# Altium PCB backup-FallDetection.PcbDoc
Units mil, origin at the board's own origin, x right, y up, seen from the top; angles counter-clockwise.
Board outline 2362.2 x 2362.2 mil, 2 copper layers (Top Layer, Bottom Layer); 36 components, 37 nets, 235 pads, 18 vias.
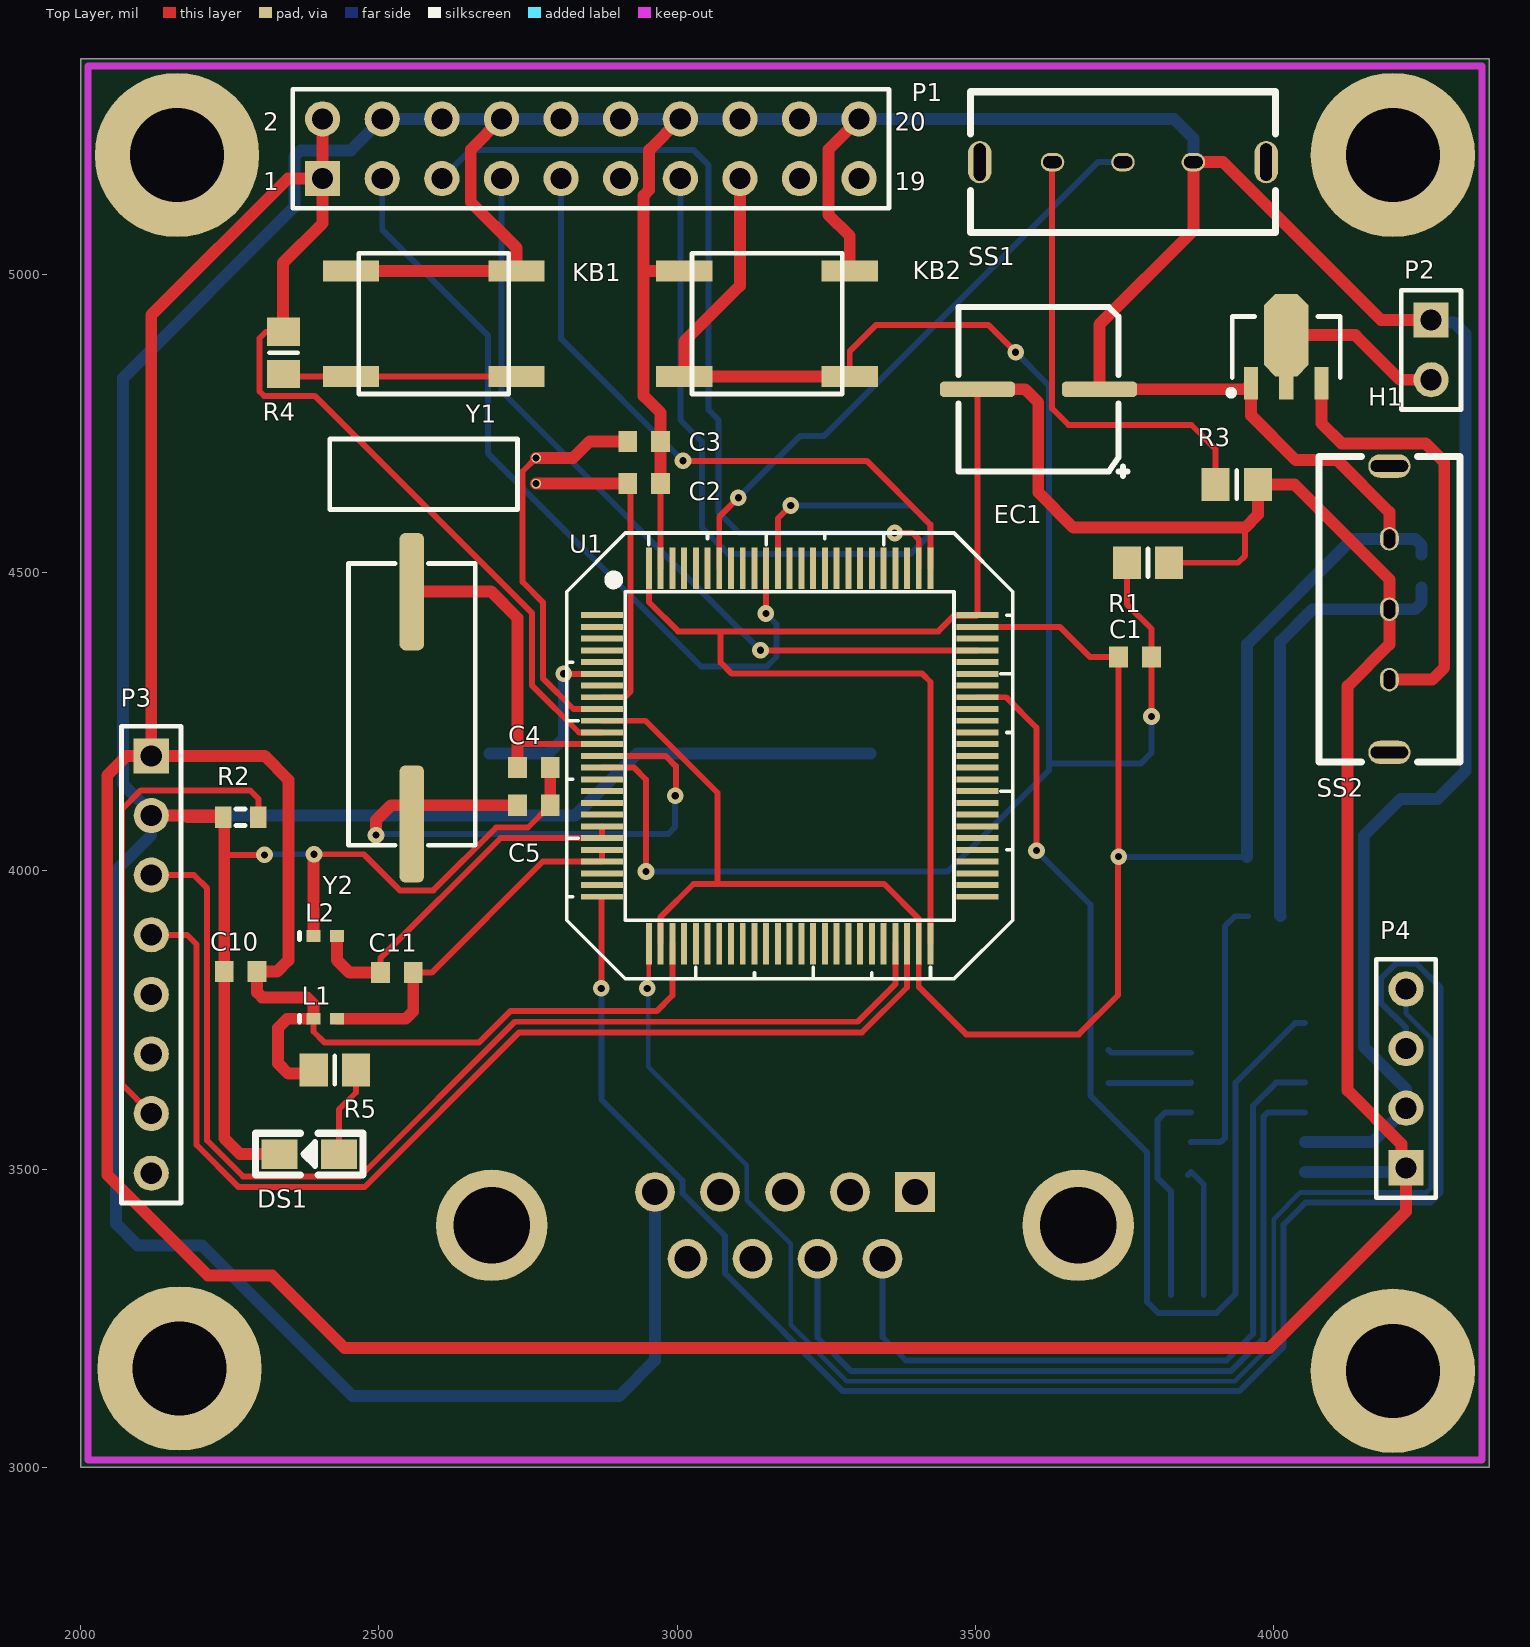
[diagram p0: Top Layer view]
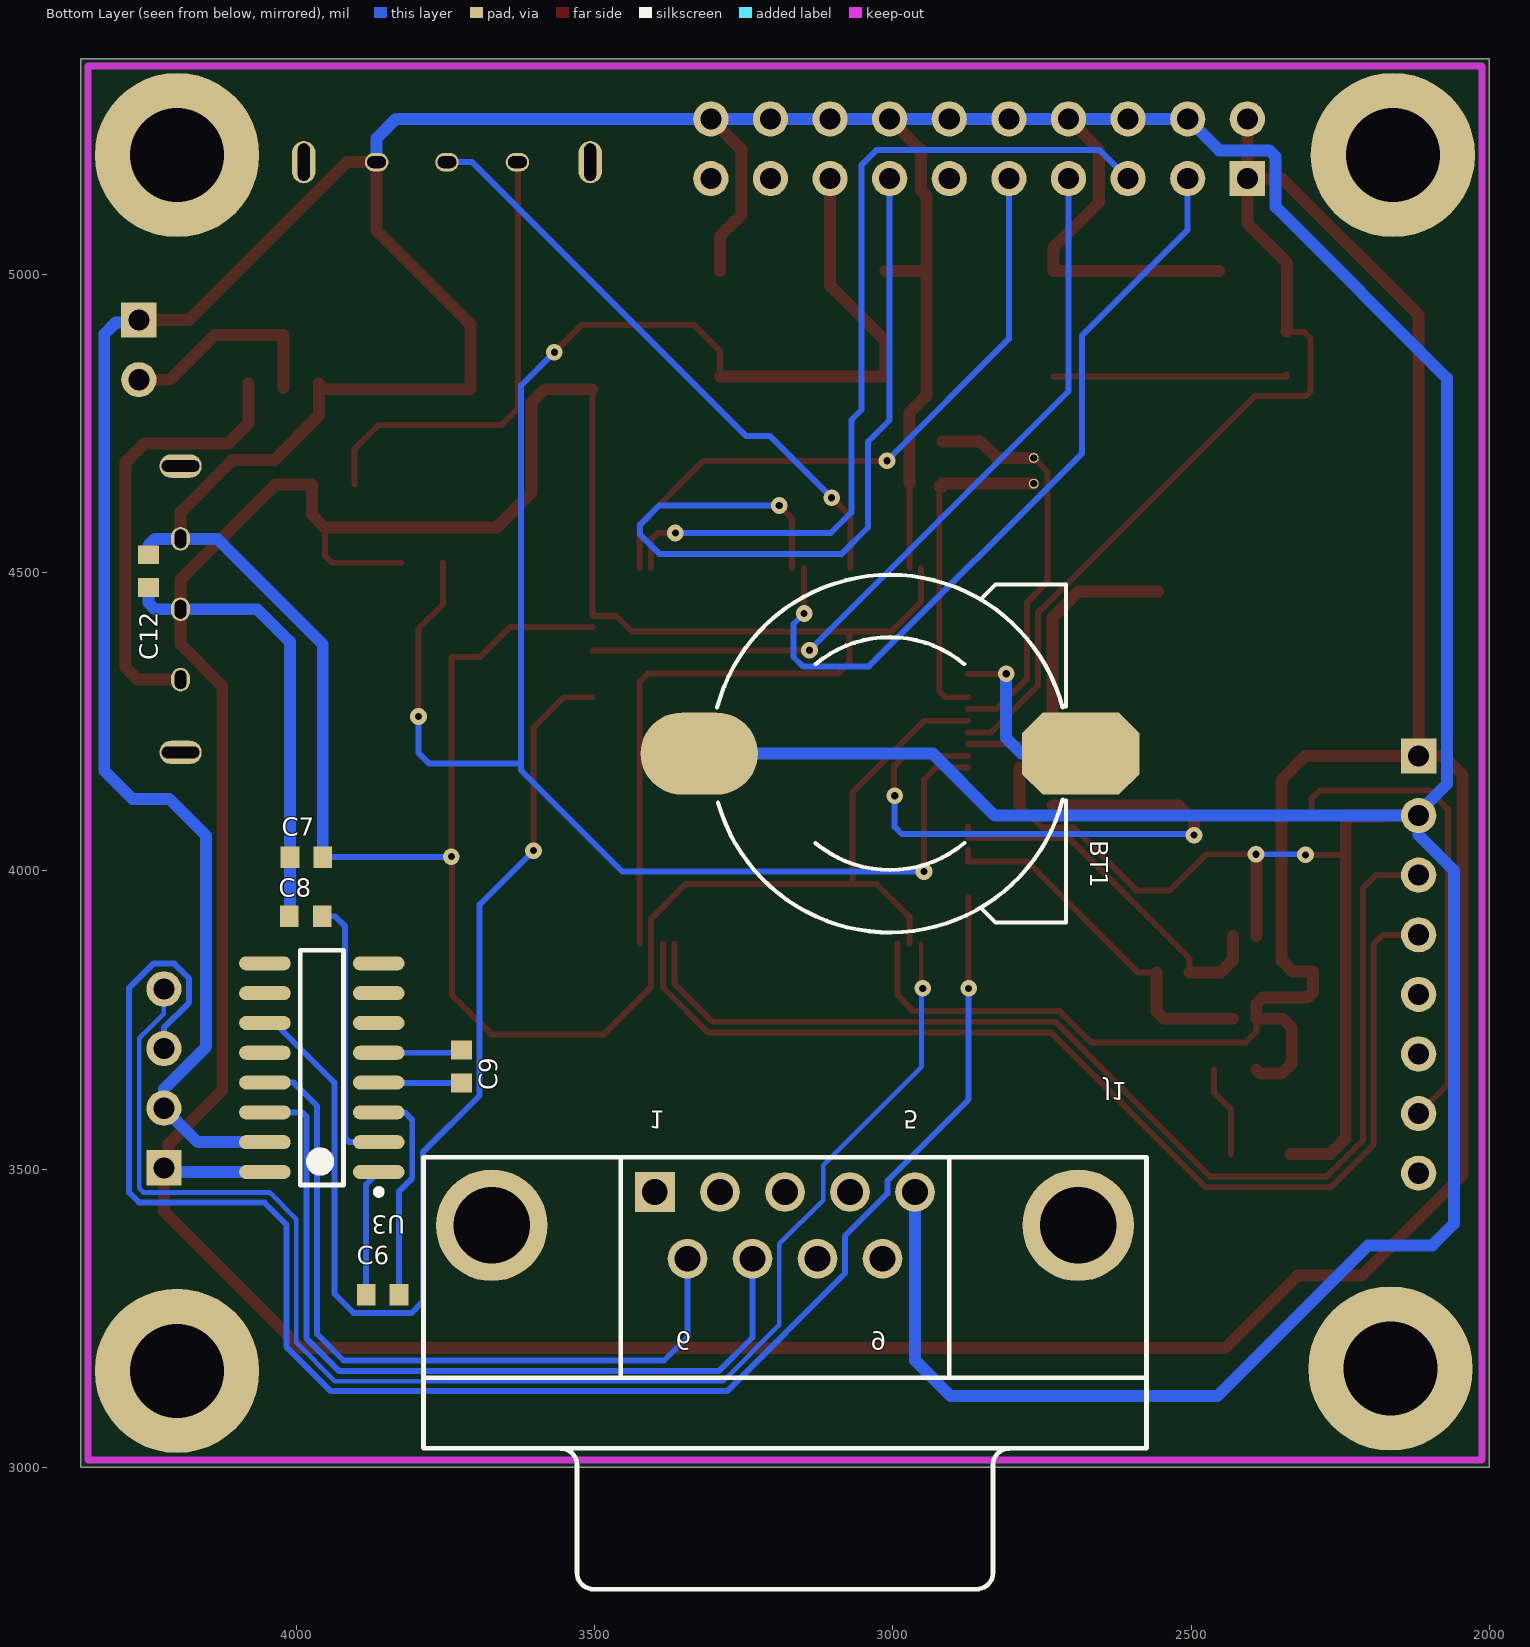
[diagram p1: Bottom Layer view, seen from below]

## Layer stack, top to bottom
Top Solder: solder mask 0.4, Solder Resist, Dk 3.5
Top Layer: signal copper 1.4
Dielectric1: dielectric 12.6, FR-4, Dk 4.8
Bottom Layer: signal copper 1.4
Bottom Solder: solder mask 0.4, Solder Resist, Dk 3.5

## Board outline
2000,3000 4362.2,3000 4362.2,5362.2 2000,5362.2

## Design rules (kind name [scope] priority, off if disabled: settings)
Clearance [All] p1: gap=7.87
HoleSize [All] p1: absolutevalues=TRUE maxlimit=100 minlimit=19.68 maxpercent=80.000 minpercent=20.000
PolygonConnect [All] p1: connectstyle=Relief reliefconductorwidth=10 reliefentries=4 polygonreliefangle="90 Angle" airgapwidth=10
RoutingVias [All] p1: holewidth=12 width=28 viastyle="Through Hole" minholewidth=8 minwidth=28 maxholewidth=28 maxwidth=50
SMDNeckDown [InNetClass('CPU')] p1: percent=120.000
SilkToSolderMaskClearance SilkscreenOverComponentPads [IsPad] p1: minsilkscreentomaskgap=10 clearancetoexposedcopper=TRUE
SolderMaskExpansion [All] p1: expansion=4
Width Width_CPU [InNetClass('CPU')] p1: maxlimit=25 minlimit=7.87 preferedwidth=20 minimp=50.000000 maximp=50.000000 favimp=50.000000
Width Width_Power [(InNet('3V3') OR InNet('3V7') OR InNet('A3V3') OR InNet('AGND') OR InNet('GND') OR InNet('VBAT'))] p2: maxlimit=25 minlimit=20 preferedwidth=20 minimp=50.000000 maximp=50.000000 favimp=50.000000 // VCC and GND
Width [All] p3: maxlimit=25 minlimit=8 preferedwidth=10 minimp=50.000000 maximp=50.000000 favimp=50.000000
27 further rules are at their usual default settings.

## Classes and differential pairs
net class CPU: 3V3 A3V3 AGND BOOT0 GND NetU1_1 NetU1_2 NetU1_3 NetU1_4 NetU1_5 NetU1_7 NetU1_15 NetU1_16 NetU1_17 NetU1_18 NetU1_23 NetU1_24 NetU1_29 NetU1_30 NetU1_31 NetU1_32 NetU1_33 NetU1_34 NetU1_35 NetU1_36 NetU1_37 NetU1_38 NetU1_39 NetU1_40 NetU1_41 NetU1_42 NetU1_43 NetU1_44 NetU1_45 NetU1_46 NetU1_51 NetU1_52 NetU1_53 NetU1_54 NetU1_55 NetU1_56 NetU1_57 NetU1_58 NetU1_59 NetU1_60 NetU1_61 NetU1_62 NetU1_63 NetU1_64 NetU1_65 NetU1_66 NetU1_67 NetU1_69 NetU1_70 NetU1_71 NetU1_73 NetU1_78 NetU1_79 NetU1_80 NetU1_81 NetU1_82 NetU1_83 NetU1_84 NetU1_85 NetU1_86 NetU1_87 NetU1_88 NetU1_91 NetU1_95 NetU1_96 NetU1_97 NetU1_98 NRST OSCI OSCO PA2 PA3 PA9 PA13 PA14 PA15 PB3 PB4 PB6 PB7 PC14 PC15 SCL SDA VBAT
component class FallDetection: C2 C3 C4 C5 R3 SS1 U1 Y1 Y2
component class periphrial: C1 C6 C7 C8 C9 DS1 J1 KB1 KB2 P1 P4 R1 R2 R4 R5 U3
component class power: BT1 C10 C11 C12 EC1 H1 L1 L2 P2 SS2

## Components (designator, comment, footprint, x,y, rotation, side; value= is the part's Value field where it differs from the comment)
BT1 "Battery" CR1220 3003.94,4196.85 r270 bottom
C1 "104" 1608[0603] 3768.35,4359 r0 top
C2 "10PF" 1608[0603] 2944.88,4649.61 r0 top
C3 "10PF" 1608[0603] 2944.88,4720.47 r0 top
C4 "10PF" 1608[0603] 2759.84,4173.23 r0 top
C5 "10PF" 1608[0603] 2759.84,4110.24 r0 top
C6 "Cap" 1608[0603] 3856,3289 r180 bottom
C7 "Cap" 1608[0603] 3984,4023 r180 bottom
C8 "Cap" 1608[0603] 3985,3924 r180 bottom
C9 "Cap" 1608[0603] 3724,3672 r90 bottom
C10 "1uF" 1608[0603] 2268,3831 r0 top
C11 "1uF" 1608[0603] 2530,3829.37 r0 top
C12 "Cap" 1608[0603] 4249,4503 r90 bottom
DS1 "LED" 0805D 2383,3525 r180 top
EC1 "47uF/25V" "47UF 25V SMT CAPS" 3504,4808 r0 top
H1 "HT7333-SOP89" HT7333-SOT89 4022,4879 r90 top
J1 "D Connector 9" DSUB1.385-2H9 3181.1,3031.5 r180 bottom
KB1 "KEY4Pin" KEY4PIN 2592,4918 r0 top
KB2 "KEY4Pin" KEY4PIN 3151,4918 r0 top
L1 "10uH" 0402-A 2410,3752 r0 top
L2 "10uH" 0402-A 2410,3891 r0 top
P1 "JTAG" HDR2X10 2405.51,5161.42 r0 top
P2 "POWER VCC" HDR1X2 4265,4924 r270 top
P3 "MPU6050" HDR1X8 2118.11,4192.91 r270 top
P4 "bluetooth1" HDR1X4 4223,3502 r90 top
R1 "103" 6-0805_N 3790,4517 r0 top
R2 "4k" J1-0603 2268,4090 r0 top
R3 "Res1" 6-0805_N 3939,4648 r0 top
R4 "Res1" 6-0805_N 2340,4869 r90 top
R5 "Res2" 6-0805_N 2426,3666 r180 top
SS1 "SW" SS-12F44 3748.03,5188.98 r180 top
SS2 "SW" SS-12F44 4195,4439 r90 top
U1 "STM32F103VET6" TQFP100-2 3188.98,4192.91 r0 top
U3 "MAX3232CSE" MAX3232CSE 3958,3670 r0 bottom
Y1 "XTAL 32.768KHz" XTAL2 2763.78,4692.91 r270 top
Y2 "XTAL 8MHz" XTAL1 2555.12,4078.74 r90 top

## Footprints (in the part's own frame and the unit in brackets; to place one, negate y for a bottom-side part, rotate by r counter-clockwise, add the part's x,y. Pads: shape width x height; smd on the part's side, far side on the other; paste and mask are expansions set on the pad)
6-0805_N [mm] "Chip Resistor, Body 2.0x1.2mm, IPC Medium Density"
  rect 1.2x1.4 smd: 1(-0.9,0) 2(0.9,0)
  silkscreen extent 0,-0.6 0,0.6, body extent -1.07,-0.7 1.07,0.7, height 0.7
"47UF 25V SMT CAPS" [mm]
  rrect50% 3.2x0.65 smd: 1(0,0) 2(5.2,0)
  silkscreen extent -0.8,-3.7 6.4,3.5
0402-A [mm] "Chip Inductor, Body 1.0x0.5mm, IPC High Density"
  rect 0.6x0.5 smd: 1(-0.5,0) 2(0.5,0)
  silkscreen extent -1.1,-0.15 -1.1,0.15, body extent -0.55,-0.3 0.55,0.3, height 0.55
0805D [mil]
  rect 60x49.21 smd: A(-50,0) K(50,0)
  silkscreen extent -90,-35 90,35, body extent -51,-25 50,25, height 50
1608[0603] [mm] "Chip Capacitor, Body 1.6x0.8mm, IPC High Density"
  rect 0.8x0.9 smd: 1(-0.7,0) 2(0.7,0)
  body extent -0.87,-0.48 0.87,0.48, height 1.3
CR1220 [mm] "CR1220"
  oct 3.5x5 smd: 1(0,8.1)
  oval 3.5x5 smd: 2(0,-8.156)
  silkscreen extent -7.62,-7.39 7.62,7.47
DSUB1.385-2H9 [mm] "Connector; D Subminiature; 9 Position; Right Angle; Pitch 1.385 mm"
  rect 1.69x1.69 hole 1.09: 1(-5.54,10.92)
  round 1.69 hole 1.09: 2(-2.77,10.92) 3(0,10.92) 4(2.77,10.92) 5(5.54,10.92) 6(-4.155,8.08) 7(-1.385,8.08) 8(1.385,8.08) 9(4.155,8.08)
  round 4.76 hole 3.26: 10(-12.495,9.5) 11(12.495,9.5)
  silkscreen extent -15.4,-6 15.4,12.4
HDR1X2 [mm] "Connector; Header; 2 Position"
  rect 1.5x1.5 hole 0.9: 1(0,0)
  round 1.5 hole 0.9: 2(2.54,0)
  silkscreen extent -1.27,-1.27 3.81,1.27
HDR1X4 [mm] "Connector; Header; 4 Position"
  rect 1.5x1.5 hole 0.9: 1(0,0)
  round 1.5 hole 0.9: 2(2.54,0) 3(5.08,0) 4(7.62,0)
  silkscreen extent -1.27,-1.27 8.89,1.27
HDR1X8 [mm] "Connector; Header; 8 Position"
  rect 1.5x1.5 hole 0.9: 1(0,0)
  round 1.5 hole 0.9: 2(2.54,0) 3(5.08,0) 4(7.62,0) 5(10.16,0) 6(12.7,0) 7(15.24,0) 8(17.78,0)
  silkscreen extent -1.27,-1.27 19.05,1.27
HDR2X10 [mm] "Connector; Header; 10x2 Position"
  rect 1.5x1.5 hole 0.9: 1(0,0)
  round 1.5 hole 0.9: 2(0,2.54) 3(2.54,0) 4(2.54,2.54) 5(5.08,0) 6(5.08,2.54) 7(7.62,0) 8(7.62,2.54) 9(10.16,0) 10(10.16,2.54) 11(12.7,0) 12(12.7,2.54) 13(15.24,0) 14(15.24,2.54) 15(17.78,0) 16(17.78,2.54) 17(20.32,0) 18(20.32,2.54) 19(22.86,0) 20(22.86,2.54)
  silkscreen extent -1.27,-1.27 24.13,3.81
HT7333-SOT89 [mm] "SOT89, 3-Leads, Body 4.5x2.4mm (max), Pitch 1.50mm, Lead Span 3.5mm, IPC Medium Density"
  rect 1.4x0.6 smd: 1(-1.55,1.499) 3(-1.55,-1.499)
  rect 1x0.6 smd: 2(-1.75,0)
  oct 3.5x1.9 smd: 2(0.5,0)
  silkscreen extent -2.07,-2.3 1.3,2.47, body extent -1.3,-2.3 1.3,2.3, height 1.6
J1-0603 [mm] "Chip Resistor, Body 1.6x0.8mm, IPC High Density"
  rect 0.7x0.9 smd: 1(-0.75,0) 2(0.75,0)
  silkscreen extent -0.2,-0.35 0.2,0.35, body extent -0.85,-0.48 0.85,0.48, height 0.9
KEY4PIN [mm] "SOP, 4-Leads, Body 6.0x6.0mm (max), Pitch 4.50mm, IPC Medium Density"
  rect 2.4x0.9 smd: 1(-3.525,2.25) 2(-3.525,-2.25) 3(3.525,-2.25) 4(3.525,2.25)
  silkscreen extent -3.2,-3 3.2,3, body extent -3,-3 3,3, height 5
MAX3232CSE [mm] "SOP, 16-Leads, Body 10.0x4.0mm (max), Pitch 1.27mm, IPC Medium Density"
  oval 2.2x0.6 smd: 1(-2.425,4.445) 2(-2.425,3.175) 3(-2.425,1.905) 4(-2.425,0.635) 5(-2.425,-0.635) 6(-2.425,-1.905) 7(-2.425,-3.175) 8(-2.425,-4.445) 9(2.425,-4.445) 10(2.425,-3.175) 11(2.425,-1.905) 12(2.425,-0.635) 13(2.425,0.635) 14(2.425,1.905) 15(2.425,3.175) 16(2.425,4.445)
  silkscreen extent -2.55,-5 0.93,5.42, body extent -2,-5 2,5, height 1.75
SS-12F44 [mm] "SS-12F44 二挡立式 1P2T SS12F44G5 滑动开关"
  oval 1x0.8 hole 0.5 slot 0.8 at 0 deg: 1(-3,0) 2(0,0) 3(3,0)
  oval 1x1.8 hole 0.5 slot 1.6 at 90 deg: 4(-6.1,0) 5(6.1,0)
  silkscreen extent -6.5,-3 6.5,3
TQFP100-2 [mil] "TQFP100-2"
  rect 70.87x10 smd: 1(-314.96,236.22)
  rect 70x10 smd: 2(-314.96,216.53) 3(-314.96,196.85) 4(-314.96,177.16) 5(-314.96,157.48) 6(-314.96,137.79) 7(-314.96,118.11) 8(-314.96,98.42) 9(-314.96,78.74) 10(-314.96,59.05) 11(-314.96,39.37) 12(-314.96,19.68) 13(-314.96,0) 14(-314.96,-19.69) 15(-314.96,-39.37) 16(-314.96,-59.06) 17(-314.96,-78.74) 18(-314.96,-98.43) 19(-314.96,-118.11) 20(-314.96,-137.8) 21(-314.96,-157.48) 22(-314.96,-177.17) 23(-314.96,-196.85) 24(-314.96,-216.54) 25(-314.96,-236.22) 51(314.96,-236.22) 52(314.96,-216.54) 53(314.96,-196.85) 54(314.96,-177.17) 55(314.96,-157.48) 56(314.96,-137.8) 57(314.96,-118.11) 58(314.96,-98.43) 59(314.96,-78.74) 60(314.96,-59.06) 61(314.96,-39.37) 62(314.96,-19.69) 63(314.96,0) 64(314.96,19.68) 65(314.96,39.37) 66(314.96,59.05) 67(314.96,78.74) 68(314.96,98.42) 69(314.96,118.11) 70(314.96,137.79) 71(314.96,157.48) 72(314.96,177.16) 73(314.96,196.85) 74(314.96,216.53) 75(314.96,236.22)
  rect 10x70 smd: 26(-236.22,-314.96) 27(-216.53,-314.96) 28(-196.85,-314.96) 29(-177.16,-314.96) 30(-157.48,-314.96) 31(-137.79,-314.96) 32(-118.11,-314.96) 33(-98.42,-314.96) 34(-78.74,-314.96) 35(-59.06,-314.96) 36(-39.37,-314.96) 37(-19.68,-314.96) 38(0,-314.96) 39(19.69,-314.96) 40(39.37,-314.96) 41(59.06,-314.96) 42(78.74,-314.96) 43(98.43,-314.96) 44(118.11,-314.96) 45(137.8,-314.96) 46(157.48,-314.96) 47(177.17,-314.96) 48(196.85,-314.96) 49(216.54,-314.96) 50(236.22,-314.96) 76(236.22,314.96) 77(216.54,314.96) 78(196.85,314.96) 79(177.17,314.96) 80(157.48,314.96) 81(137.8,314.96) 82(118.11,314.96) 83(98.43,314.96) 84(78.74,314.96) 85(59.06,314.96) 86(39.37,314.96) 87(19.69,314.96) 88(0,314.96) 89(-19.68,314.96) 90(-39.37,314.96) 91(-59.05,314.96) 92(-78.74,314.96) 93(-98.42,314.96) 94(-118.11,314.96) 95(-137.79,314.96) 96(-157.48,314.96) 97(-177.16,314.96) 98(-196.85,314.96) 99(-216.53,314.96) 100(-236.22,314.96)
  silkscreen extent -374,-374 374,374
XTAL1 [mm] "2 leads XTAL SMT"
  rrect50% 5x1.05 smd: 1(0,0) 2(9.9,0)
  silkscreen extent -0.9,-2.7 11.1,2.7
XTAL2 [mm] "32.768 KHz"
  round 0.42 hole 0.3: 1(0,0) 2(1.1,0)
  silkscreen extent -0.8,-8.8 2.2,-0.8

## Part data
BT1: "Multicell Battery"
C1: library part CAP, "Ceramic Capacitor"
C2 C3 C4 C5 C10 C11: library part Cap, "Capacitor"
C6 C7 C8 C9 C12: "Capacitor"
EC1: library part "Cap Pol1", "Polarized Capacitor (Radial)"
H1: library part HT7333
J1: "Receptacle Assembly, 9 Position, Right Angle"
L1 L2: library part Inductor, "Inductor"
P1: library part "Header 10X2", "Header, 10-Pin, Dual row"
P2: library part "Header 2", "Header, 2-Pin"
P3: library part "Header 8", "Header, 8-Pin"
P4: library part "Header 4", "Header, 4-Pin"
R1: library part RES2, "Resistor"
R2: library part Res3, "Resistor"
R3 R4 R5: "Resistor"
SS1 SS2: library part SS-12F44, "拨动开关 SS-12F44 二挡立式 1P2T SS12F44G5 滑动开关"
U1: "ST High-density performance line ARM-based 32-bit MCU with 256 to  512KB Flash, USB, CAN, 11 timers, 3 ADCs, 13 communication interfaces"
Y1 Y2: library part XTAL, "Crystal Oscillator"

## Free pads (board coordinates)
  round 275.59 hole 157.48: 0(4200.79,5200.79) 1(2161.42,5200.79) 2(2165.35,3165.35) 3(4200.79,3161.42)

## Via types
v1: diameter 28, hole 12, Top Layer to Bottom Layer, 18 vias

## Nets (pads, with @x,y where several pads share a name; then routed paths per layer and width w, separated by ;. In a path a pad name is that pad's centre, name@x,y a point inside that pad or via, vN(x,y) a via of type N, cw(c..) or ccw(c..) an arc to the next point about the centre after c; other vN are vias at no path point)
3V3: C7.1 C8.1 C10.2 C12.1 EC1.1 L1.1 P1.1 P1.2 P3.1 P4.1 R1.2 R3.2 R4.2 R5.2 SS2.2 U1.11 U1.28 U1.50 U1.75 U1.100 U3.16 | length 12495.5
  Top Layer w10: R4.2 2310.43,4904.43 2299.57,4893.57 2299.57,4804.61 2307.11,4797.07 2392.28,4797.07 2757,4432.35 2757,4310.78 2835.49,4232.28 U1.11 ; L1.1 2390.31,3730.69 2409,3712 2667.53,3712 2720.41,3764.87 2965.87,3764.87 2992.13,3791.13 U1.28 ; U1.100 2952.76,4451.24 3002,4402 3073,4402 ; U1.50 3425.2,4317.01 3411.2,4331 3092,4331 3073,4350 3073,4402 ; EC1.1@3503.94,4807.94 U1.75 3502.13,4427.32 3463.61,4427.32 3438.28,4402 3073,4402 ; R1.2 3941,4517 3953,4529 3953,4576
  Top Layer w20: R4.2 2339,4905.43 2339,5020 2405.51,5086.51 P1.1 ; R5.2@2384.06,3660 2348,3660 2331,3677 2331,3737 2346,3752 L1.1 2390.31,3776.69 2379,3788 2304,3788 2295.56,3796.44 C10.2 2313.56,3831 2329,3831 2348,3850 2348,4153 2308.09,4192.91 P3.1 ; R5.2@2390.31,3666.25 R5.2 ; P1.2 P1.1 ; EC1.1 3584,4808 3606,4786 3606,4635 3665,4576 3953,4576 3974.43,4597.43 R3.2 4036,4648 4195,4489 SS2.2 4195,4380 4125,4310 4125,3632 4215,3542 4215,3510 P4.1 4223,3429 3994,3200 2442.05,3200 2321.02,3321.02 2213.57,3321.02 2044.29,3490.3 2044.29,4160.29 2076.91,4192.91 P3.1 ; P3.1 2118.11,4932.53 2347,5161.42 P1.1
  Bottom Layer w20: C8.1 4011.56,3925 C7.1 4011.56,4384.56 4066,4439 SS2.2 4238,4439 4249,4450 C12.1 ; U3.16 4223,3495 P4.1
3V7: H1.2 P2.2 | length 370.5
  Top Layer w20: H1.2@4022,4810.1 4022,4898.69 4138,4898.69 4212.69,4824 P2.2 P2.2@4273,4824
A3V3: C11.2 L1.2 U1.21 U1.22 | length 611.2
  Top Layer w10: C11.2 2588.37,3829.37 2774.75,4015.75 U1.22 U1.21
  Top Layer w20: L1.2 2545,3752 2557.56,3764.56 C11.2
AGND: C11.1 L2.2 U1.19 U1.20 | length 790.9
  Top Layer w10: C11.1 2502.44,3853.44 2704,4055 ; U1.20 U1.19 ; 2704,4055 2874.02,4055 2704,4055
  Top Layer w20: L2.2 2429.68,3850.32 2450.63,3829.37 C11.1
BOOT0: SS1.2 U1.94 | length 1009.7
  Top Layer w10: U1.94 3070.87,4594 v1(3102.87,4626)
  Bottom Layer w10: v1(3102.87,4626) 3206.73,4729.87 3246.87,4729.87 3705.98,5188.98 SS1.2@3744,5188.98
  Bottom Layer w20: SS1.2@3744,5188.98 SS1.2
GND: BT1.2 C1.1 C2.2 C3.2 C4.2 C5.2 C7.2 C10.1 C12.2 DS1.K EC1.2 H1.1 J1.5 KB1.1 KB1.4 KB2.1 KB2.4 L2.1 P1.4 P1.6 P1.8 P1.10 P1.12 P1.14 P1.16 P1.18 P1.20 P2.1 P3.2 P4.2 R2.1 SS1.1 SS2.3 U1.10 U1.27 U1.49 U1.74 U1.99 U3.15 | length 16042.9
  Top Layer w10: 2240.44,4024 2243.44,4027 v1(2308,4027) ; v1(2391,4028) 2474.61,4028 2535.17,3967.44 2591.16,3967.44 2696.6,4072.87 2750.04,4072.87 C5.2 ; U1.10 2947.22,4251.97 3068,4131.19 3068,3978 ; U1.27 2972.44,3922.85 ; U1.99 C2.2 ; 2974.25,3924.66 3027.6,3978 3068,3978 ; U1.74 3642,4409.45 3692.45,4359 C1.1 v1(3740.79,4024) ; v1@3740,4024 3740,3792 3674,3726 3485,3726 3405.51,3805.49 U1.49 3405.51,3920 3347.51,3978 3068,3978
  Top Layer w20: P3.2 2173,4092.91 ; R2.1 2178.91,4090 2176,4092.91 2173,4092.91 ; DS1.K 2267,3525 2240.44,3551.56 C10.1 2240.44,4024 2240.44,4093 2173.09,4093 2173,4092.91 ; L2.1 2390.31,4027.31 v1(2391,4028) ; KB1.1 KB1.4 2730.78,5045.22 2654,5122 2654,5209.91 P1.8 ; C5.2 2787.4,4141 C4.2 ; C2.2 C3.2 2972.44,4768.56 2944,4797 2944,5004 ; P1.14 2954,5209.91 2952.91,5208.82 2952.91,5141.78 2944,5132.87 2944,5004 ; KB2.1 2946.58,5006.58 2944,5004 ; KB2.4 3289.78,5065.22 3254,5101 3254,5209.91 P1.20 ; SS2.3 4195,4602 4108,4689 4038,4689 3962.98,4764.02 H1.1 3953.01,4808 EC1.2 3708.72,4916.72 3866.14,5074.14 SS1.1 3916.02,5188.98 4181,4924 P2.1
  Bottom Layer w10: v1@2307,4028 v1(2391,4028) ; v1@3740.79,4023.79 v1(3740.79,4024) ; v1@3744,4023 C7.2
  Bottom Layer w20: J1.5 2962.99,3178.99 2903,3119 2456,3119 2203,3372 2095,3372 2059,3408 2059,4001 2118.11,4060.11 P3.2 ; BT1.2 2932.85,4196.85 2828.91,4092.91 P3.2 ; SS1.1 3866.14,5228.86 3833.58,5261.42 P1.20 P1.18 P1.16 P1.14 P1.12 P1.10 P1.8 P1.6 P1.4 2452.91,5208.82 2368.58,5208.82 2358.11,5198.35 2358.11,5114.02 2070.71,4826.61 2070.71,4145.51 2118.11,4098.11 P3.2 ; C7.2 3956.44,4380.44 4133.11,4557.11 SS2.3 4237.89,4557.11 4249,4546 C12.2 ; U3.15 4166,3545 P4.2 4223,3634 4152,3705 4152,4059 4214,4121 4276,4121 4323,4168 4323,4900.61 4303.61,4920 4269,4920 P2.1
NetC6_1: C6.1 U3.1 | length 221.8
  Bottom Layer w10: U3.1@3857.53,3490 U3.1 3883.56,3473.97 C6.1
NetC6_2: C6.2 U3.3 | length 363.9
  Bottom Layer w10: C6.2 3828.44,3462.68 3806.35,3484.78 3806.35,3582.35 3819,3595 U3.3
NetC8_2: C8.2 U3.2 | length 459.9
  Bottom Layer w10: U3.2 3912,3545 3919,3552 3919,3907 3936,3924 C8.2
NetC9_1: C9.1 U3.4 | length 138.8
  Bottom Layer w10: C9.1 3861.97,3644.44 U3.4
NetC9_2: C9.2 U3.5 | length 140.4
  Bottom Layer w10: C9.2 3728.56,3695 U3.5
NetDS1_A: DS1.A R5.1 | length 152.8
  Top Layer w10: DS1.A 2433,3600 2461.43,3628.43 R5.1
NetH1_2: H1.3 SS2.1 | length 745.2
  Top Layer w20: H1.3 4081.02,4750.98 4115,4717 4256,4717 4287,4686 4287,4341 4266.89,4320.89 SS2.1
NetJ1_6: J1.6 U3.13 | length 1273.7
  Bottom Layer w10: J1.6 3344.69,3218.31 3384.13,3178.87 3921.6,3178.87 3966.13,3223.4 3966.13,3606.13 4005,3645 U3.13
NetJ1_7: J1.7 U3.14 | length 1371.1
  Bottom Layer w10: J1.7 3235.63,3217.37 3292,3161 3929,3161 3984,3216 3984,3588 3991,3595 U3.14
NetP3_7: P3.7 R2.2 | length 839.3
  Top Layer w10: P3.7 2069.23,3641.79 2069.23,4104 2100.55,4135.32 2283.68,4135.32 2298,4121 R2.2@2298,4102.47 ; R2.2 R2.2@2288.53,4090 ; R2.2@2288.53,4090 R2.2@2288.53,4093 ; R2.2@2288.53,4090 R2.2@2288.53,4093 ; R2.2@2288.53,4093 R2.2@2298,4102.47 ; R2.2@2288.53,4093 R2.2@2298,4102.47
NetR3_1: R3.1 SS1.3 | length 1189.3
  Top Layer w10: SS1.3 SS1.3@3629,5188.98 ; R3.1 3903.57,4707.43 3863,4748 3657,4748 3629,4776 ; 3629,4776 SS1.3@3629,5188.98 ; 3629,4776 SS1.3@3629,5188.98
NRST: C1.2 KB2.2 KB2.3 P1.15 R1.1 U1.14 | length 3228.9
  Top Layer w10: U1.14 2928,4173.23 2948,4153.23 v1(2948,3999) ; KB2.3 3289.78,4871.78 3334,4916 3522,4916 v1(3568,4870) ; R1.1 3754.57,4447.43 3795.91,4406.09 C1.2 3796,4358.91 v1(3796,4259)
  Top Layer w20: P1.15 3105.51,4981.51 3012.22,4888.22 KB2.2 KB2.3
  Bottom Layer w10: v1(2948,3999) 3454,3999 3624,4169 3624,4814 v1(3568,4870) ; 3624,4180 3778,4180 3796,4198 v1(3796,4259)
OSCI: C4.1 U1.12 Y2.2 | length 723.1
  Top Layer w10: 2732.28,4215 2734.68,4212.6 U1.12
  Top Layer w20: Y2.2 Y2.2@2555.12,4469 ; C4.1 2732.28,4215 2732.28,4424.72 2688,4469 ; Y2.2@2555.12,4469 2688,4469 ; Y2.2@2555.12,4469 2688,4469
OSCO: C5.1 U1.13 Y2.1 | length 1080.3
  Top Layer w10: U1.13 2981,4192.91 2998,4175.91 2998,4127 v1(2997,4126)
  Top Layer w20: v1(2495,4060) 2495,4085 2520.24,4110.24 ; C5.1 2586.61,4110.24 ; 2520.24,4110.24 2586.61,4110.24 ; 2520.24,4110.24 2586.61,4110.24
  Bottom Layer w10: v1@2497,4062 2985,4062 2997,4074 v1(2997,4126)
  Bottom Layer w20: v1(2495,4060) v1@2497,4062
PA2: P4.3 U1.25 | length 2863.2
  Top Layer w10: v1(2873,3803) U1.25@2873,3955.68
  Bottom Layer w10: v1(2873,3803) 2873,3616.66 3009.13,3480.53 3009.13,3459.08 3080.43,3387.78 3080.43,3325.02 3278.07,3127.38 3942.93,3127.38 4017.62,3202.07 4017.62,3407 4054.47,3443.85 4264.38,3443.85 4281.15,3460.62 4281.15,3803.82 4240.56,3844.4 4205.44,3844.4 4180.6,3819.56 4180.6,3779.09 4223,3736.69 P4.3
PA3: P4.4 U1.26 | length 2459.6
  Top Layer w7.87: v1(2950,3803) 2952.76,3805.76 U1.26
  Bottom Layer w7.87: v1(2950,3803) 2952,3801 2952,3671.62 3117.13,3506.5 3117.13,3447.87 3190.55,3374.45 3190.55,3238.67 3285.04,3144.19 3935.96,3144.19 4000.81,3209.04 4000.81,3415.81 4045.66,3460.66 4257.42,3460.66 4264.34,3467.58 4264.34,3719.12 4223,3760.46 P4.4
PA9: U1.68 U3.11 | length 1841.9
  Top Layer w10: U1.68 3552,4291.34 3603,4240.34 v1(3603,4034)
  Bottom Layer w10: v1(3603,4034) 3693.41,3943.59 3693.41,3623.36 3788.47,3528.3 3788.47,3277.29 3807.36,3258.41 3904.64,3258.41 3936.87,3290.64 3936.87,3644.81 4037.07,3745 U3.11
PA10: U3.12
PA13: P1.7 U1.72 | length 1335.3
  Top Layer w10: v1(3139.92,4370.08) U1.72
  Bottom Layer w10: P1.7 2705.51,4804.49 v1(3139.92,4370.08)
PA14: P1.9 U1.76 | length 1090.6
  Top Layer w10: v1(3010,4688) 3318,4688 3425.2,4580.8 U1.76
  Bottom Layer w10: P1.9 2805.51,4892.49 v1(3010,4688)
PA15: P1.5 U1.77 | length 1470.2
  Top Layer w10: v1(3365,4567) 3395,4567 3405.51,4556.49 U1.77
  Bottom Layer w10: P1.5 2653.09,5209 3028,5209 3053,5184 3053,4773.25 3069.75,4756.5 3069.75,4601.25 3104,4567 v1(3365,4567)
PB3: P1.13 U1.89 | length 1391.6
  Top Layer w10: U1.89 3169.29,4591.47 v1(3190.82,4613)
  Bottom Layer w10: P1.13 3005.51,4756.36 3041.87,4720 3041.87,4576 3085.87,4532 3392,4532 3424,4564 3424,4581 3392,4613 v1(3190.82,4613)
PB4: P1.3 U1.90 | length 1329.3
  Top Layer w10: v1(3149,4432) 3149,4507.27 U1.90
  Bottom Layer w10: P1.3 2505.51,5075.49 2682.64,4898.36 2682.64,4700.85 3040.28,4343.2 3151.05,4343.2 3166.8,4358.95 3166.8,4414.2 v1(3149,4432)
PB6: U1.92
PB7: U1.93
PC14: C2.1 U1.8 Y1.2 | length 564.4
  Top Layer w10: U1.8 2912.54,4291.34 2922.32,4301.12 C2.1@2922.32,4644.61
  Top Layer w20: Y1.2 C2.1 C2.1@2917.32,4644.61 ; C2.1@2917.32,4644.61 2922.32,4644.61 C2.1@2917.32,4644.61
PC15: C3.1 U1.9 Y1.1 | length 678.8
  Top Layer w10: Y1.1 2740.91,4670.04 2740.91,4484.81 2775,4450.72 2775,4323 2826.35,4271.65 U1.9
  Top Layer w20: Y1.1 2826,4692.91 2853.56,4720.47 C3.1
PE5: KB1.2 KB1.3 R4.1 | length 396.7
  Top Layer w10: R4.1 R4.1@2339,4830 ; KB1.3 KB1.2 2340.58,4829.42 R4.1@2340,4830 ; R4.1@2339,4830 R4.1@2340,4830 ; R4.1@2339,4830 R4.1@2340,4830
SCL: P3.3 U1.47 | length 1906.6
  Top Layer w10: P3.3 2189.65,3992.91 2211.82,3970.75 2211.82,3547.83 2272.13,3487.52 2468.33,3487.52 2727.81,3747 3303,3747 3366.14,3810.14 U1.47
SDA: P3.4 U1.48 | length 1852.3
  Top Layer w10: P3.4 2177.91,3892.91 2193.95,3876.88 2193.95,3540.43 2264.73,3469.65 2475.74,3469.65 2735.22,3729.13 3310.4,3729.13 3385.83,3804.55 U1.48
VBAT: BT1.1 U1.6 | length 307.6
  Top Layer w10: v1(2810,4330.71) U1.6
  Bottom Layer w20: BT1.1 2784,4196.85 2810,4222.85 v1(2810,4330.71)
pads on no net: J1.1 J1.2 J1.3 J1.4 J1.8 J1.9 J1.10 J1.11 P1.11 P1.17 P1.19 P3.5 P3.6 P3.8 SS1.4 SS1.5 SS2.4 SS2.5 U1.1 U1.2 U1.3 U1.4 U1.5 U1.7 U1.15 U1.16 U1.17 U1.18 U1.23 U1.24 U1.29 U1.30 U1.31 U1.32 U1.33 U1.34 U1.35 U1.36 U1.37 U1.38 U1.39 U1.40 U1.41 U1.42 U1.43 U1.44 U1.45 U1.46 U1.51 U1.52 U1.53 U1.54 U1.55 U1.56 U1.57 U1.58 U1.59 U1.60 U1.61 U1.62 U1.63 U1.64 U1.65 U1.66 U1.67 U1.69 U1.70 U1.71 U1.73 U1.78 U1.79 U1.80 U1.81 U1.82 U1.83 U1.84 U1.85 U1.86 U1.87 U1.88 U1.91 U1.95 U1.96 U1.97 U1.98 U3.6 U3.7 U3.8 U3.9 U3.10

## Keep-outs
Keep-Out Layer:
  lines w11.81: 2011.81,3011.81 4350.39,3011.81 4350.39,5350.39 2011.81,5350.39 2011.81,3011.81

## Silkscreen, mask and mechanical layers (free items; w line width, h text height)
Mechanical 3:
  lines w7.87: 2003.94,5350.39 2011.81,5350.39
Mechanical 15:
  lines w10: 1838.27,3060 1858.27,3000 ; 1838.27,5302.2 1858.27,5362.2 ; 1848.27,3000 1868.27,3000 ; 1848.27,5362.2 1868.27,5362.2 ; 1858.27,3980.16 1858.27,3000 ; 1858.27,4382.04 1858.27,5362.2 ; 1878.27,3060 1858.27,3000 ; 1878.27,5302.2 1858.27,5362.2 ; 2000,5466.38 2000,5486.38 ; 2060,5456.38 2000,5476.38 ; 2060,5496.38 2000,5476.38 ; 2980.16,5476.38 2000,5476.38 ; 3382.04,5476.38 4362.2,5476.38 ; 4302.2,5456.38 4362.2,5476.38 ; 4302.2,5496.38 4362.2,5476.38 ; 4362.2,5466.38 4362.2,5486.38
  text "60 (mm)" at 2990.16,5440.39 h60
  text "60 (mm)" at 1894.26,3990.16 h60 r90

## Text inside footprints (layer, text, board x,y; h text height)
J1: Bottom Overlay "1" at 3409.06,3597.44 h30 r180; Bottom Overlay "5" at 2982.68,3597.44 h30 r180; Bottom Overlay "9" at 3037.2,3227.36 h30 r180; Bottom Overlay "6" at 3364.37,3227.36 h30 r180
P1: Top Overlay "2" at 2305.51,5241.42 h30; Top Overlay "1" at 2305.51,5141.42 h30; Top Overlay "19" at 3365.51,5141.42 h30; Top Overlay "20" at 3365.51,5241.42 h30